# Altium PCB PCB1.PcbDoc
Units mm, origin at the board's own origin, x right, y up, seen from the top; angles counter-clockwise.
Board outline 38.29 x 38.22 mm, 4 copper layers (Top Layer, 3V3, GND, Bottom Layer), stack 0.603 mm thick; 55 components, 36 nets, 203 pads, 85 vias.
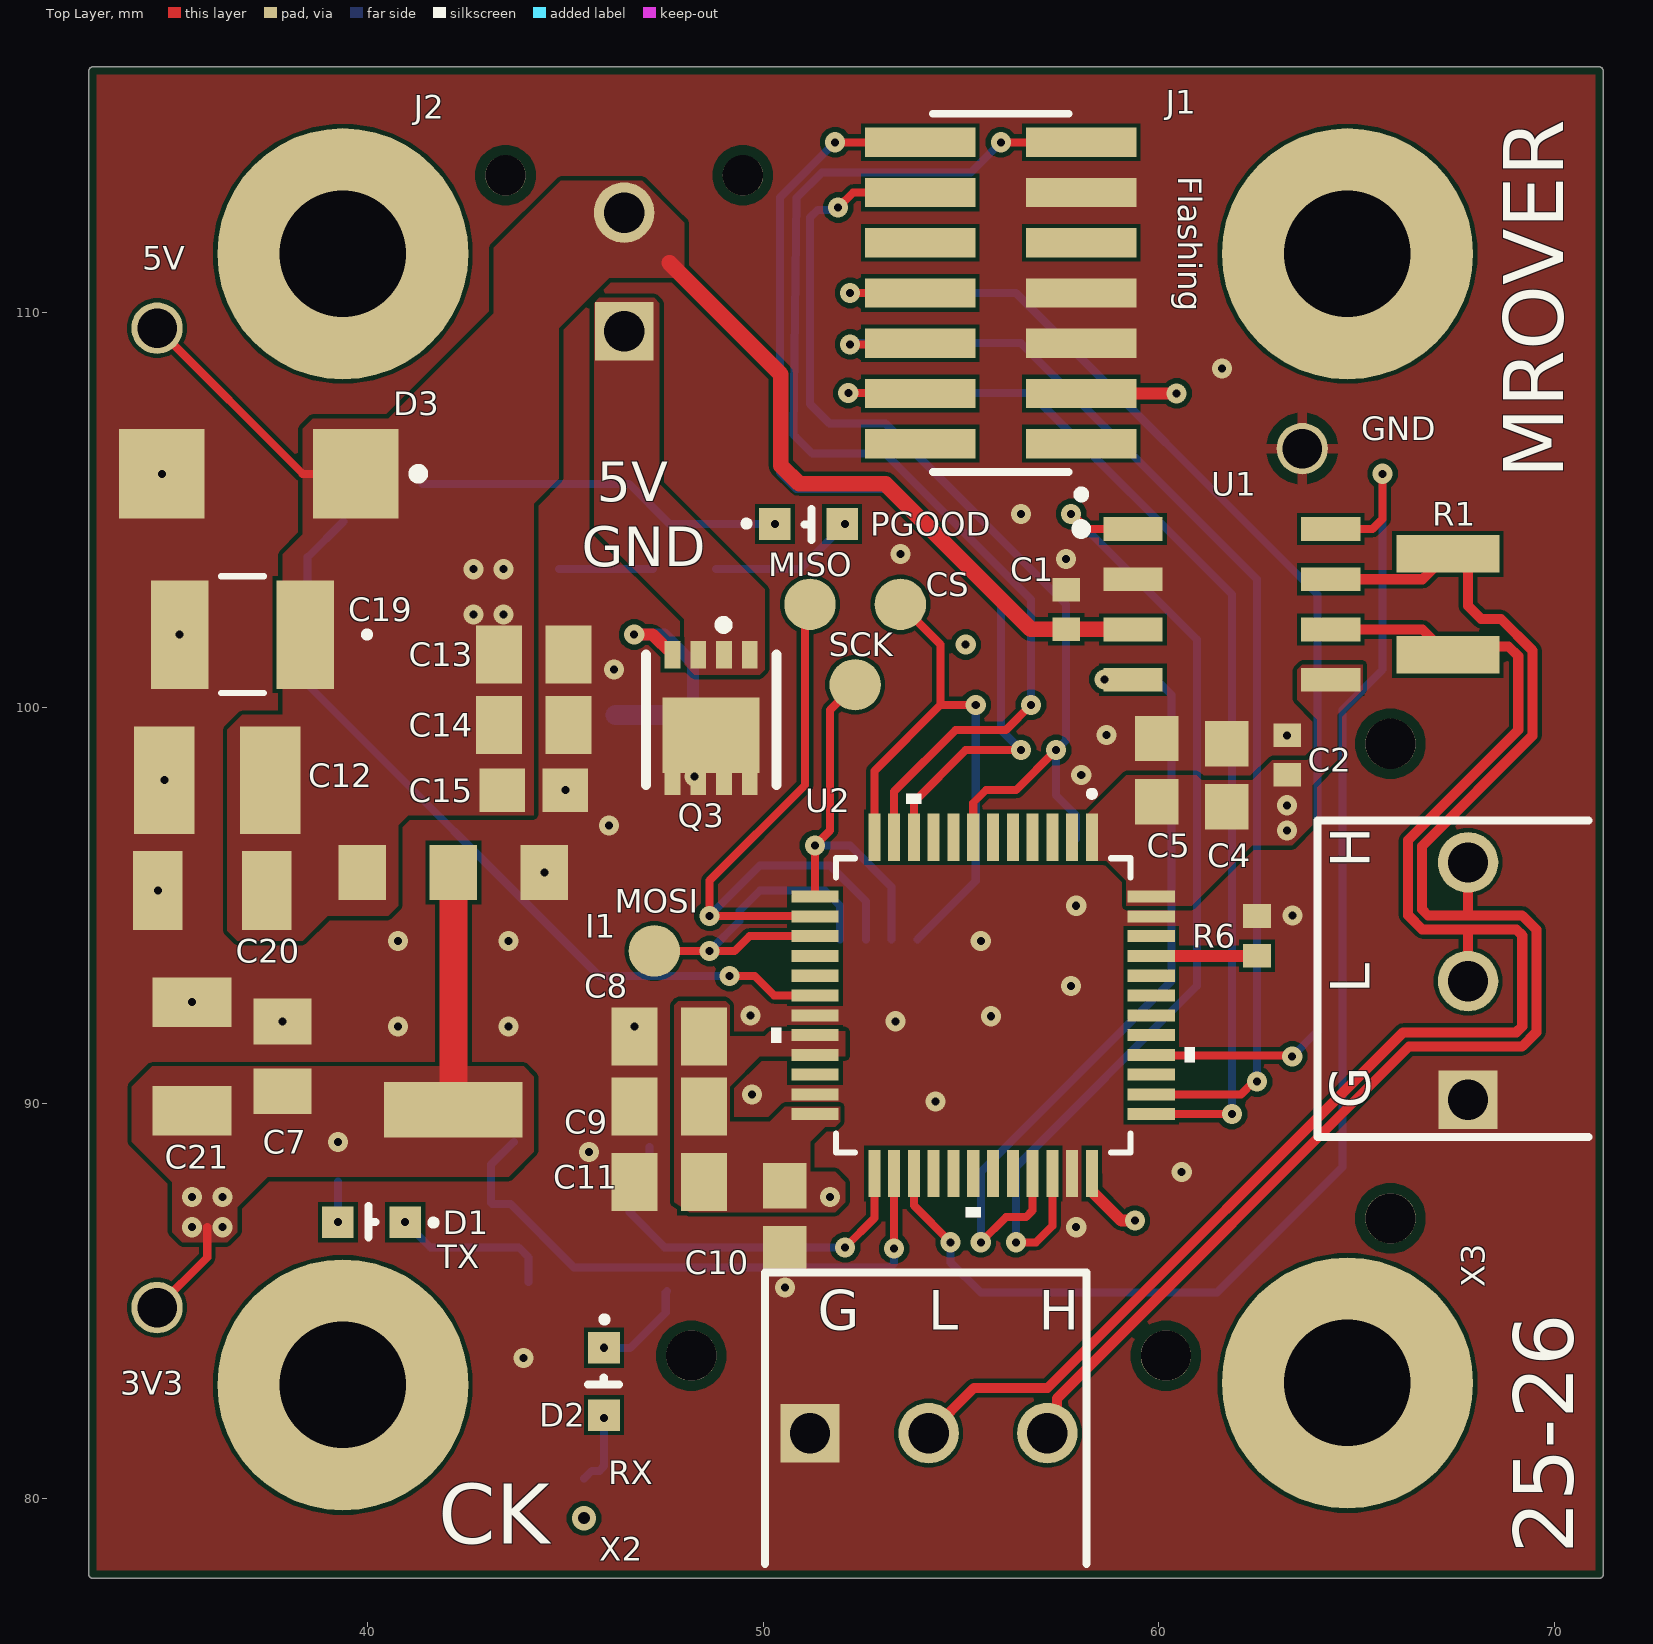
[diagram p0: Top Layer view]
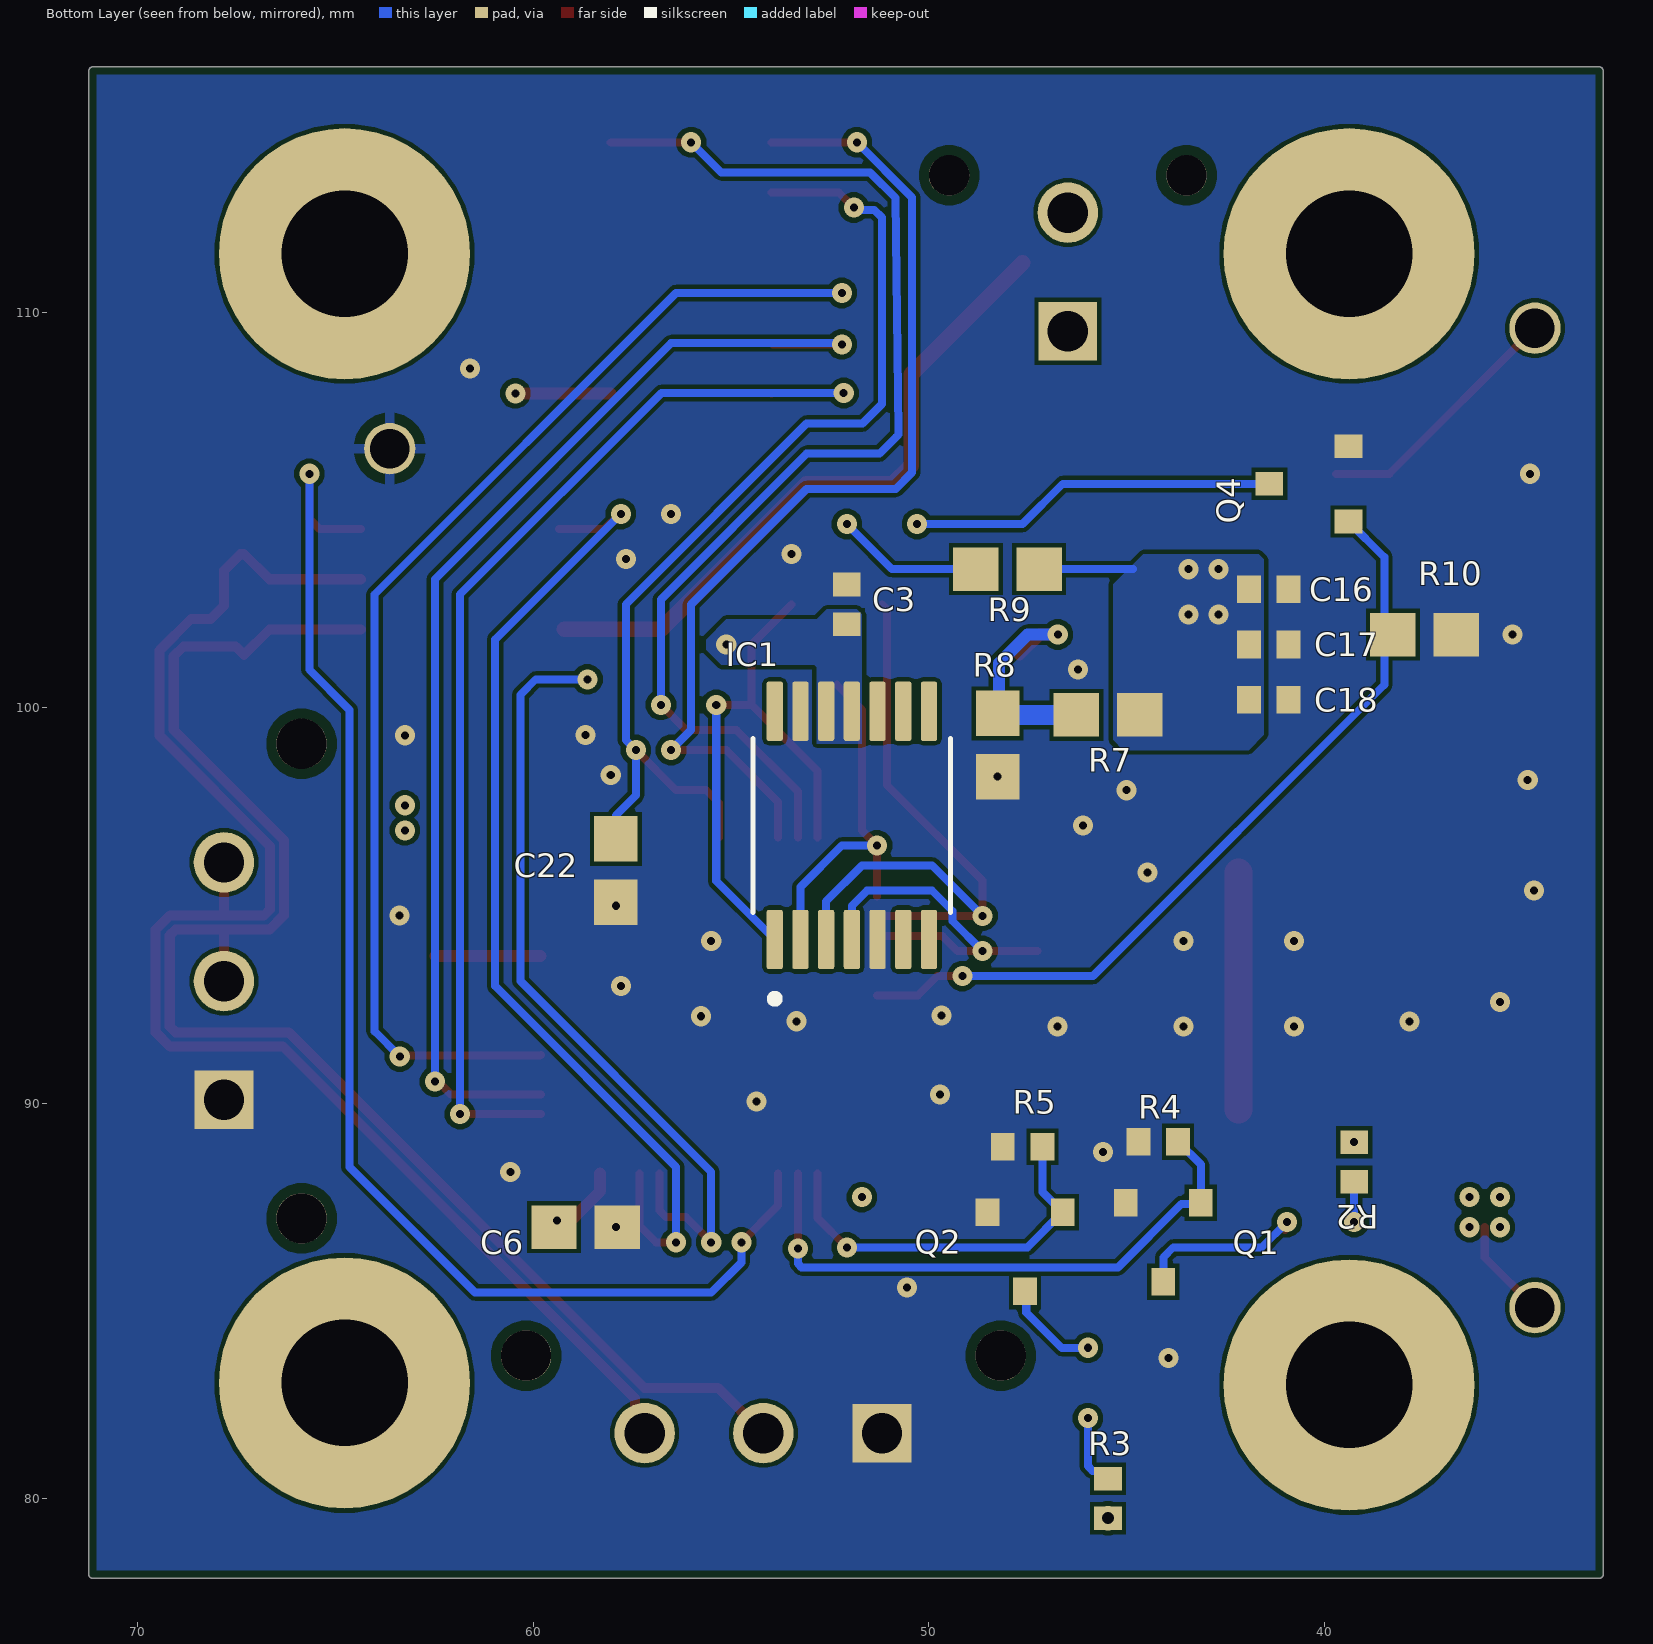
[diagram p1: Bottom Layer view, seen from below]
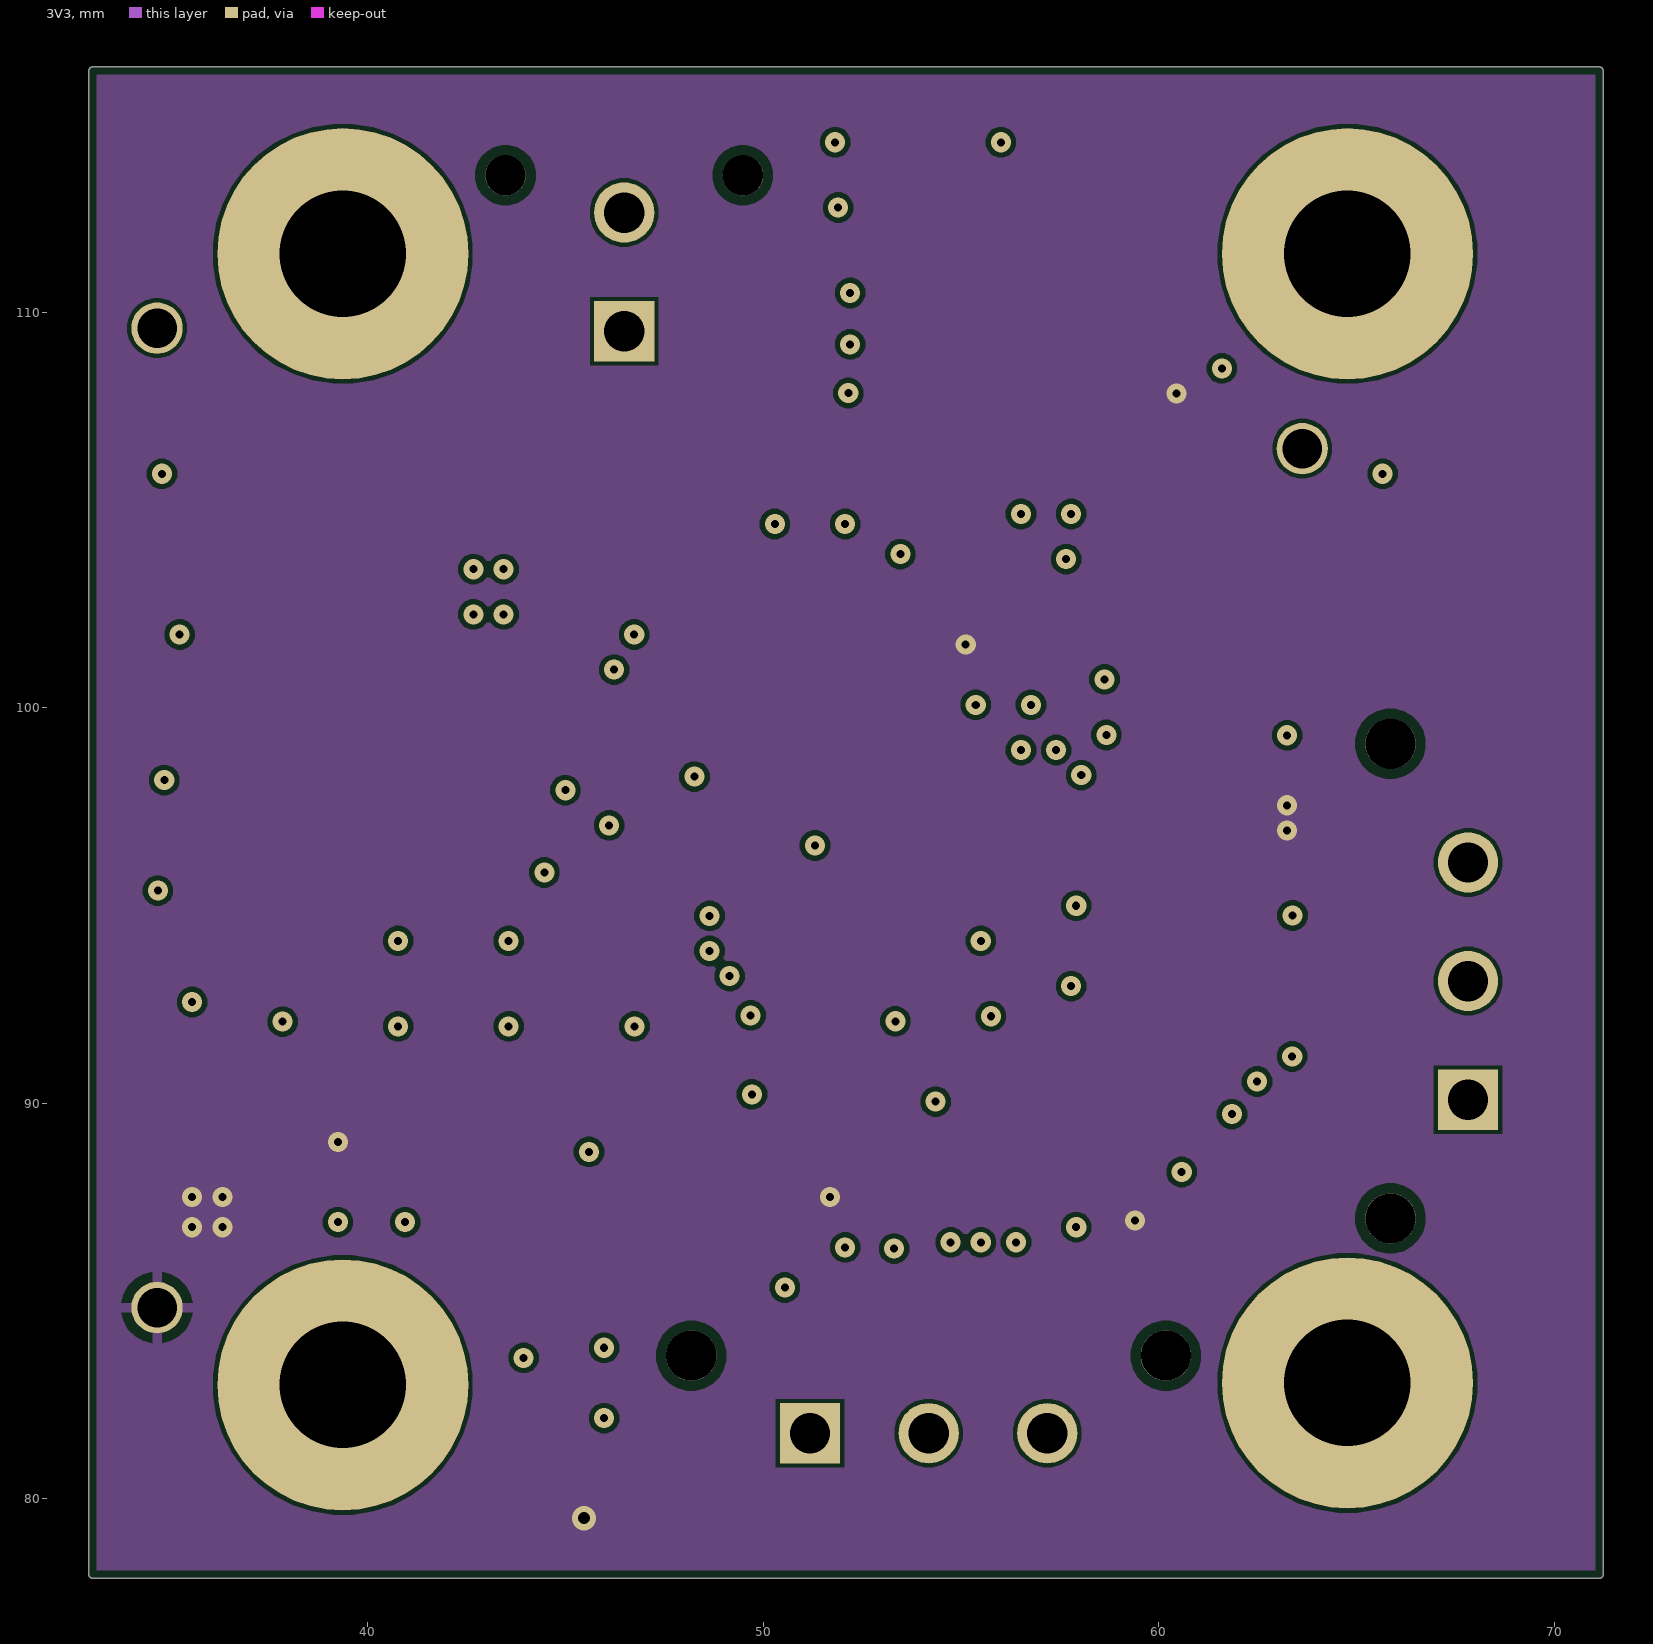
[diagram p2: 3V3]
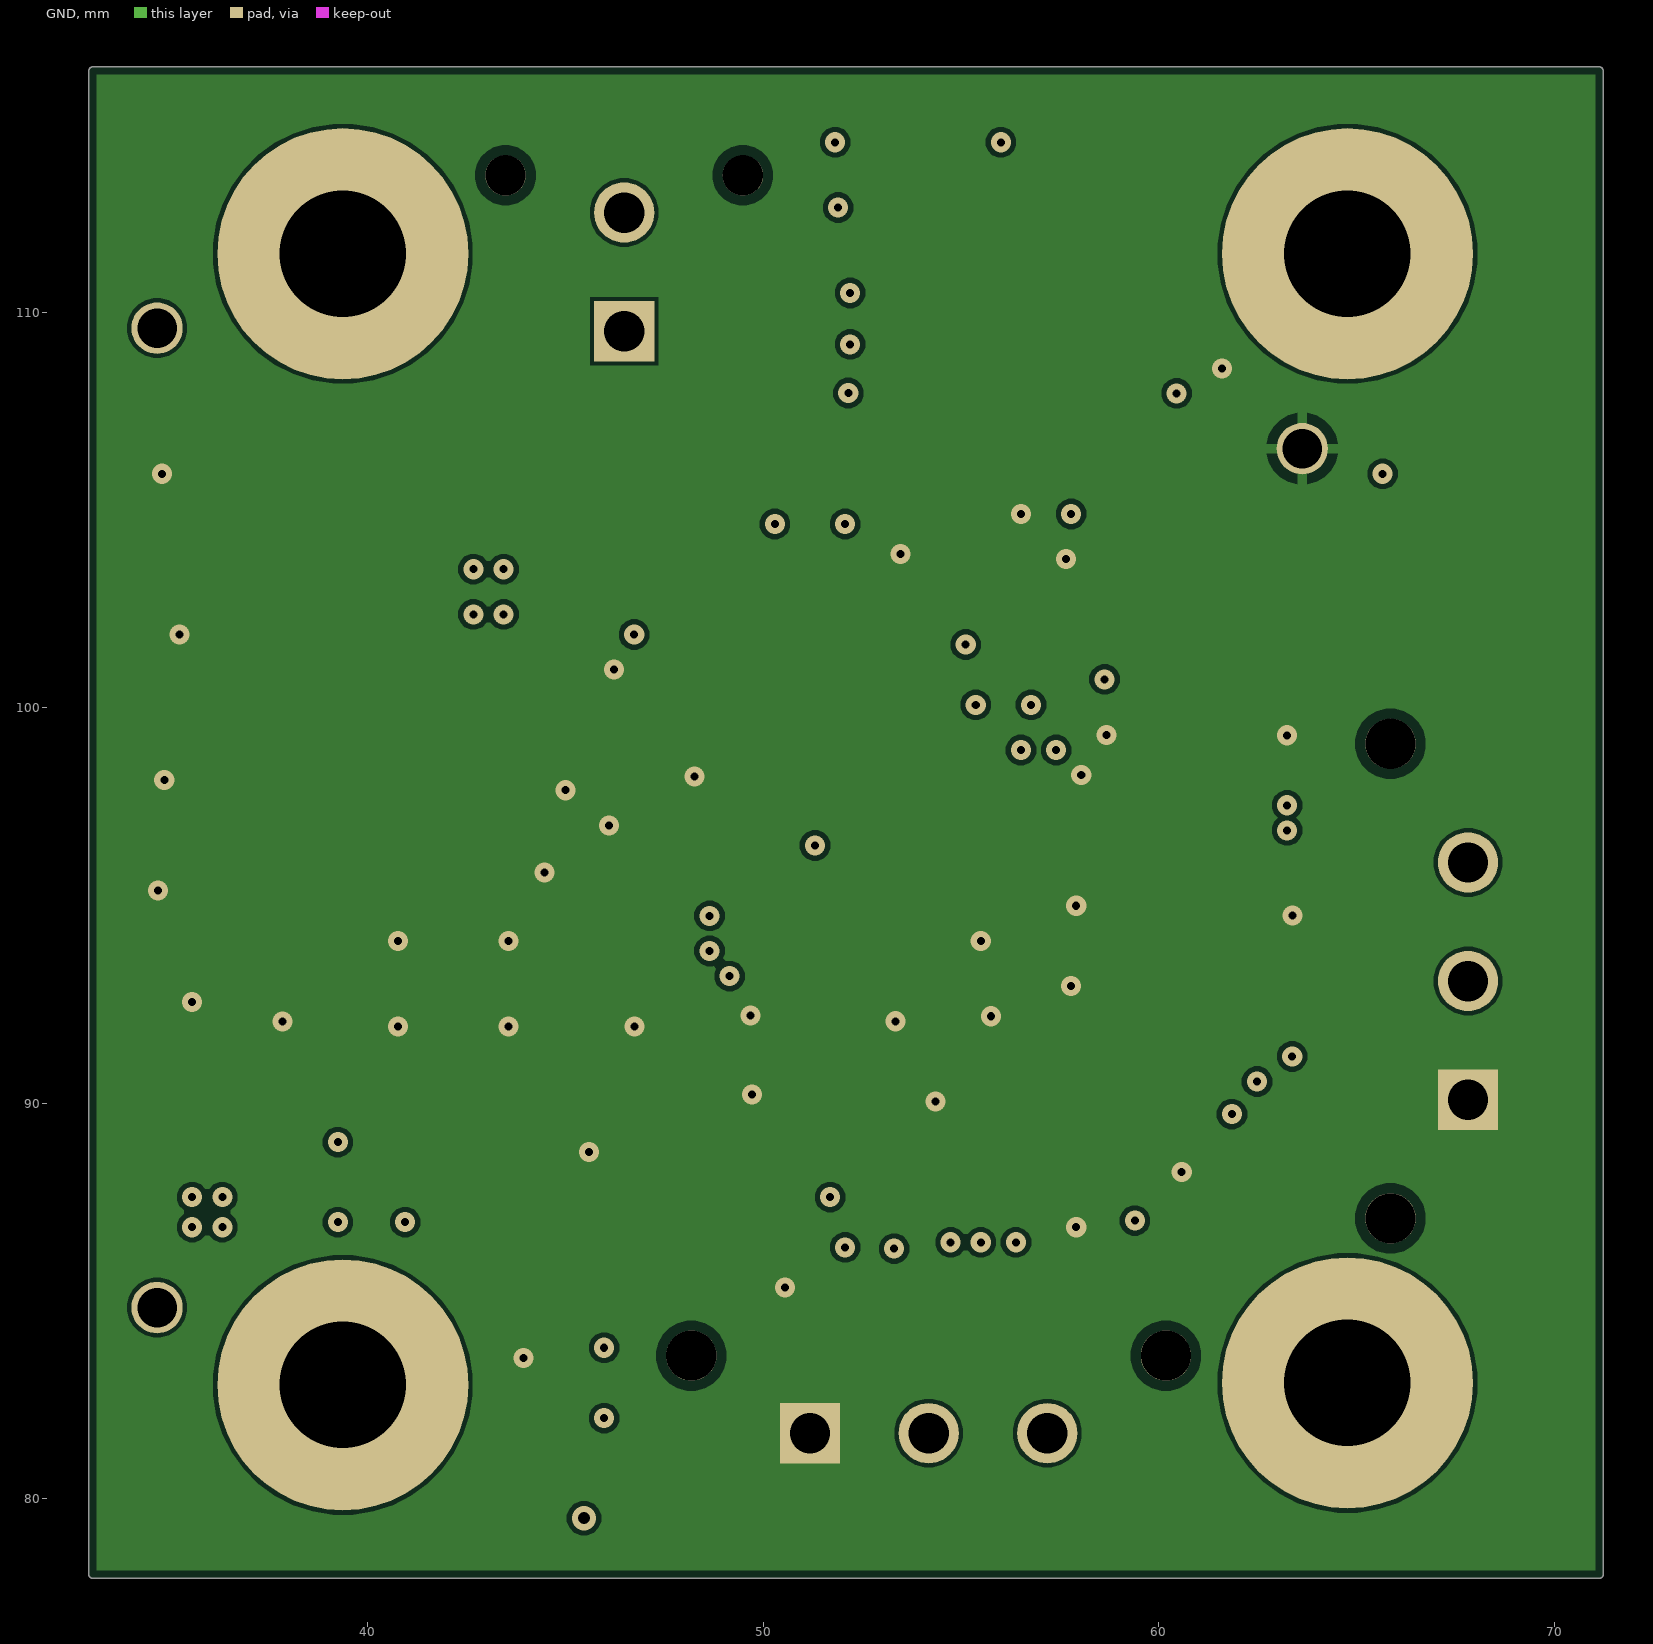
[diagram p3: GND]

## Layer stack, top to bottom
Top Solder: solder mask 0.0102, Solder Resist, Dk 3.5
Top Layer: signal copper 0.0356
Dielectric 2: prepreg 0.0711, PP-006, Dk 4.1
3V3: signal copper 0.035
Dielectric 1: dielectric 0.32, FR-4, Dk 4.8
GND: signal copper 0.035
Dielectric 3: prepreg 0.0711, PP-006, Dk 4.1
Bottom Layer: signal copper 0.0356
Bottom Solder: solder mask 0.0102, Solder Resist, Dk 3.5

## Board outline
33.048,77.989 cw(c33.048,78.091) 32.948,78.112 32.946,78.133 32.946,116.106 cw(c33.048,116.106) 33.048,116.208 71.134,116.208 cw(c71.134,116.106) 71.236,116.106 71.236,78.091 cw(c71.134,78.091) 71.134,77.989

## Design rules (kind name [scope] priority, off if disabled: settings)
BoardOutlineClearance [All] p1: gap=0.2 ignorepadtopadclearanceinfootprint=FALSE
Clearance "Stitching GND" [IsStitchingVia and InNet('GND') vs (IsVia and (Not IsStitchingVia)) Or IsPad] p1: gap=0.127 ignorepadtopadclearanceinfootprint=FALSE
Clearance [All] p2: gap=0.102 ignorepadtopadclearanceinfootprint=FALSE except(0.127: Arc-Via Track-Via SMDPad-Via THPad-Via Via-Via Via-Fill Via-Poly Via-Region Via-Text; 0.25: Arc-Hole Track-Hole SMDPad-Hole THPad-Hole Via-Hole Fill-Hole Poly-Hole Region-Hole Text-Hole)
ComponentClearance [All] p1: gap=0.102 collisioncheckmode=3 verticalgap=0.102 showdistances=TRUE
DiffPairsRouting [All] p1: maxlimit=0.102 minlimit=0.102 mostfreqgap=0.102 toplayer_minwidth=0.102 toplayer_maxwidth=1816.048 toplayer_prefwidth=0.102 midlayer1_minwidth=0.102 midlayer1_maxwidth=1816.048 midlayer1_prefwidth=0.102 midlayer2_minwidth=0.102 midlayer2_maxwidth=1816.048 midlayer2_prefwidth=0.102 bottomlayer_minwidth=0.102 bottomlayer_maxwidth=1816.048 bottomlayer_prefwidth=0.102 maxuncoupledlength=12.7
DiffPairsRouting USB [OnLayer('Top Layer') And InDifferentialPairClass('USB')] p2: maxlimit=0.127 minlimit=0.127 mostfreqgap=0.127 toplayer_maxgap=0.127 toplayer_prefgap=0.127 toplayer_minwidth=0.237 toplayer_maxwidth=0.237 toplayer_prefwidth=0.237 midlayer1_mingap=0.127 midlayer1_minwidth=0.089 midlayer1_maxwidth=0.089 midlayer1_prefwidth=0.089 midlayer2_mingap=0.127 midlayer2_minwidth=0.089 midlayer2_maxwidth=0.089 midlayer2_prefwidth=0.089 bottomlayer_maxgap=0.127 bottomlayer_prefgap=0.127 bottomlayer_minwidth=0.237 bottomlayer_maxwidth=0.237 bottomlayer_prefwidth=0.237 impedanceprofiledriven=TRUE impedanceprofileid={C8994B27-2D6B-4B4B-A1C4-DCAF0529D0FB} maxuncoupledlength=12.7
Height [All] p1: minheight=0 maxheight=1816.048 prefheight=12.7
HoleSize [All] p1: absolutevalues=TRUE maxlimit=6.3 minlimit=0.2 maxpercent=80.000 minpercent=20.000
HoleToHoleClearance [All] p1: gap=0.25 allowstackedmicrovias=FALSE
MinimumAnnularRing [All] p1: minimumring=0.076
MinimumSolderMaskSliver [All] p1: minsoldermaskwidth=0
PlaneClearance [All] p1: clearance=0.102
PlaneConnect PlaneConnectPowerPads [InPadClass('PowerPads')] p1: planeconnectstyle=Direct reliefexpansion=0.508 reliefentries=4 reliefconductorwidth=0.254 reliefairgap=0.254
PlaneConnect [All] p2: planeconnectstyle=Direct reliefexpansion=0.3 reliefentries=4 reliefconductorwidth=0.102 reliefairgap=0.102
PolygonConnect PolygonConnectPowerPads [All vs (InPadClass('PowerPads'))] p1: connectstyle=Direct reliefconductorwidth=0.254 reliefentries=4 polygonreliefangle="90 Angle" airgapwidth=0.254
PolygonConnect [All] p2: connectstyle=Direct reliefconductorwidth=0.102 reliefentries=4 polygonreliefangle="90 Angle" airgapwidth=0.102
RoutingVias [All] p1: holewidth=0.305 width=0.605 viastyle="Through Hole" minholewidth=0.3 minwidth=0.6 maxholewidth=0.405 maxwidth=0.705
SilkToSilkClearance [All] p1: silktosilkclearance=0
SilkToSolderMaskClearance [IsPad] p1: minsilkscreentomaskgap=0.102 clearancetoexposedcopper=TRUE
SolderMaskExpansion [All] p1: expansion=0.075 istentingtop=FALSE
SupplyNets "Schematic Supply Nets_2" [InNet('VBAT')] p1: voltage=0.000
SupplyNets "Schematic Supply Nets_3" [InNet('GND')] p2: voltage=0.000
SupplyNets "Schematic Supply Nets_1" [InNet('5V')] p3: voltage=0.000
Width [All] p1: maxlimit=0.508 minlimit=0.102 preferedwidth=0.254 minimp=50.000000 maximp=50.000000 favimp=50.000000
20 further rules are at their usual default settings.

## Classes and differential pairs
component class MCU: C4 C5 C6 C7 C8 C9 C10 C11 C22 D4 J1 Q4 R6 R9 U2
component class Input_Power: C12 C13 C14 C15 C16 C17 C18 C19 C20 C21 D3 I1 Q3 R7 R8 TP1 TP2
component class Headers: X2 X3
component class Encoder: C3 IC1 TP3 TP4 TP5 TP6
component class CAN: C1 C2 D1 D2 Q1 Q2 R1 R2 R3 R4 R5 U1
differential pair CAN: +CAN_H -CAN_L

## Components (designator, comment, footprint, x,y, rotation, side; value= is the part's Value field where it differs from the comment)
3V3 "5003" TEST-POINT-0001 34.671,84.836 r0 top (schematic designator TP1)
5V "5003" TEST-POINT-0001 34.671,109.601 r0 top (schematic designator TP2)
C1 "CC0402KRX7R7BB104" CAP-0402 57.658,102.489 r90 top
C2 "CC0402KRX7R7BB104" CAP-0402 63.246,98.806 r90 top
C3 "CC0402KRX7R7BB104" CAP-0402 52.07,102.616 r90 bottom
C4 "CC0603KRX7R0BB104" CAP-0603 61.722,98.298 r270 top
C5 "CC0603KRX7R0BB104" CAP-0603 59.944,98.425 r270 top
C6 "CC0603KRX7R0BB104" CAP-0603 58.674,86.868 r0 bottom
C7 "CC0805KKX5R9BB475" CAP-0805 37.846,91.186 r270 top
C8 "GRM2195C1H103JA01D" CAP-0805 47.625,91.694 r0 top
C9 "CC0805KKX7R9BB105" CAP-0805 47.625,89.916 r0 top
C10 "CC0603KRX7R0BB104" CAP-0603 50.546,87.122 r90 top
C11 "CC0805KKX7R9BB105" CAP-0805 47.625,88.011 r0 top
C12 "CL32B106KBJNNNE" CAP-1210 36.195,98.171 r0 top
C13 "CC0805KKX7R9BB105" CAP-0805 44.196,101.346 r180 top
C14 "CC0805KRX7R9BB104" CAP-0805 44.196,99.568 r180 top
C15 "CC0603KPX7R9BB103" CAP-0603 44.196,97.917 r180 top
C16 "CC0402KRX7R9BB102" CAP-0402 41.402,102.997 r0 bottom
C17 "CC0402JRNPO9BN101" CAP-0402 41.402,101.6 r0 bottom
C18 "CC0402JRNPO9BN100" CAP-0402 41.402,100.203 r0 bottom
C19 "EMK325ABJ107MM-T" CAP_EMK325AB_3P2X2P5_TAY-M 36.83,101.854 r180 top
C20 "293D106X9016A2TE3" CAP-1206 36.068,95.377 r0 top
C21 "293D106X9016A2TE3" CAP-1206 35.56,91.186 r270 top
C22 "CC0603KRX7R0BB104" CAP-0603 57.912,95.885 r270 bottom
CS "5003" TEST02 53.467,102.616 r90 top (schematic designator TP3)
D1 "BL-HKC36G-AV-TRB" LED-0603 41.534,87.746 r180 top
D2 "BL-HKC36G-AV-TRB" LED-0603 45.223,84.409 r270 top
D3 "SMBJ6.0" "DO-214AA (SMBJ)" 37.211,105.918 r0 top
GND "5003" TEST-POINT-0001 63.627,106.553 r0 top (schematic designator TP?)
I1 "LM1117IMPX-3.3/NOPB" IC-SOT-223-4 42.164,92.837 r270 top
IC1 "AS5047D-ATSM" SOP65P640X110-14N 51.943,97.028 r90 bottom
J1 "FTSH-107-01-L-DV-K" SAMTEC_FTSH-107-01-L-DV-K 56.004,110.49 r90 top
J2 "0430450212" CONN-2POS-0001 46.482,109.522 r0 top (schematic designator J?)
MISO "5003" TEST02 51.181,102.616 r90 top (schematic designator TP5)
MOSI "5003" TEST02 47.244,93.853 r90 top (schematic designator TP6)
PGOOD "BL-HKC36G-AV-TRB" LED-0603 49.703,103.897 r0 top (schematic designator D4)
Q1 "T2N7002AK,LM" IC-SOT23-3 44.069,86.487 r0 bottom
Q2 "T2N7002AK,LM" IC-SOT23-3 47.564,86.249 r0 bottom
Q3 "CSD18543Q3AT" IC-8VSONCLIP 50.519,102.223 r180 top
Q4 "T2N7002AK,LM" IC-SOT23-3 40.386,105.664 r90 bottom
R1 "RC1210FR-07120RL" RES-1210 67.31,102.616 r90 top
R2 "RC0402FR-07100RL" RES-0402 39.243,88.519 r90 bottom
R3 "RC0402FR-07100RL" RES-0402 45.466,80.01 r270 bottom
R4 "RC0402FR-0780K6L" RES-0402 44.196,89.027 r180 bottom
R5 "RC0402FR-0780K6L" RES-0402 47.625,88.9 r180 bottom
R6 "RC0402FR-070RL" RES-0402 62.484,94.234 r270 top
R7 "RC0603FR-07200KL" RES-0603 45.466,99.822 r0 bottom
R8 "RC0603FR-07100KL" RES-0603 48.26,99.06 r270 bottom
R9 "RT0603FRE131KL" RES-0603 48.006,103.505 r0 bottom
R10 "RT0603FRE131KL" RES-0603 37.465,101.854 r0 bottom (schematic designator R?)
SCK "5003" TEST02 52.324,100.584 r90 top (schematic designator TP4)
U1 "TCAN1044VDRQ1" IC-8SOIC 61.849,102.616 r270 top
U2 "STM32G431CBT6" IC-LQFP48 55.558,92.476 r270 top
X2 "Molex 43650-0315" 43650-0315 54.181,81.661 r180 top
X3 "Molex 43650-0315" 43650-0315 67.818,93.091 r270 top

## Footprints (in the part's own frame and the unit in brackets; to place one, negate y for a bottom-side part, rotate by r counter-clockwise, add the part's x,y. Pads: shape width x height; smd on the part's side, far side on the other; paste and mask are expansions set on the pad)
43650-0315 [mm]
  round 1.27 hole 1.27 unplated: 1(-6,-1.96) 1(6,-1.96)
  rect 1.482x1.482 / inner rect 1.524x1.524 / far side rect 1.482x1.482 hole 1.02: P$1(3,0)
  round 1.53 / inner round 1.524 / far side round 1.53 hole 1.02: P$2(0,0) P$3(-3,0)
  body extent -6.32,-2.47 6.33,3.14, height 10.03
CAP-0402 [mm]
  rect 0.6x0.7 smd: 1(-0.5,0) 2(0.5,0)
  body extent -0.5,-0.22 0.5,0.23, height 0.5
CAP-0603 [mm]
  rect 1.15x1.1 smd: 1(-0.8,0) 2(0.8,0)
  body extent -0.8,-0.45 0.8,0.45, height 0.8
CAP-0805 [mm]
  rect 1.16x1.47 smd: 1(-0.88,0) 2(0.88,0)
  body extent -1,-0.63 1,0.63, height 0.94
CAP-1206 [mm]
  rect 1.25x2 smd: 1(-1.375,0) 2(1.375,0)
  body extent -1.6,-0.8 1.6,0.8, height 1.5
CAP-1210 [mm]
  rect 1.53x2.72 smd: 1(-1.341,0) 2(1.341,0)
  body extent -1.6,-1.25 1.6,1.25, height 2.7
CAP_EMK325AB_3P2X2P5_TAY-M [mil]
  rect 57x108 smd paste+0 mask+0: 1(-62.5,0) 2(62.5,0)
  silkscreen extent -127,-58 22,58
CONN-2POS-0001 [mm]
  round 1.02 hole 1.02 unplated: 1(-3,3.94) 1(3,3.94)
  rect 1.482x1.482 / inner rect 1.524x1.524 / far side rect 1.482x1.482 hole 1.02: 1(0,0)
  round 1.53 / inner round 1.524 / far side round 1.53 hole 1.02: 2(0,3)
  body extent -3.57,-2.42 3.57,6.35, height 9.91
"DO-214AA (SMBJ)" [mm]
  rect 2.16x2.26 smd: 1(-2.416,0) 2(2.484,0)
  silkscreen extent 3.94,-0.12 4.19,0.12, body extent -2.72,-1.95 2.78,1.95, height 2.45
IC-8SOIC [mm]
  rect 0.6x1.5 smd: 1(-1.905,-2.5) 2(-0.635,-2.5) 3(0.635,-2.5) 4(1.905,-2.5) 5(1.905,2.5) 6(0.635,2.5) 7(-0.635,2.5) 8(-1.905,2.5)
  silkscreen extent -2.03,-3.93 -1.78,-3.68, body extent -2.45,-3 2.45,3, height 1.75
IC-8VSONCLIP [mm]
  rect 0.4x0.7 smd paste-100 mask+0.05: 1(2.812,0.877) 2(0.862,0.877) 2(1.512,0.877) 2(2.162,0.877) 3(0.862,4.077) 3(1.512,4.077) 3(2.162,4.077) 3(2.812,4.077)
  rect 2.45x1.9 smd paste-100 mask+0.05: 3(1.837,2.917)
  silkscreen extent 0.19,0.03 3.49,4.18, body extent 0.18,0.89 3.48,4.19, height 1.1
IC-LQFP48 [mm]
  rect 1.194x0.305 smd paste+0 mask+0: 1(-4.25,2.75) 2(-4.25,2.25) 3(-4.25,1.75) 4(-4.25,1.25) 5(-4.25,0.75) 6(-4.25,0.25) 7(-4.25,-0.25) 8(-4.25,-0.75) 9(-4.25,-1.25) 10(-4.25,-1.75) 11(-4.25,-2.25) 12(-4.25,-2.75) 25(4.25,-2.75) 26(4.25,-2.25) 27(4.25,-1.75) 28(4.25,-1.25) 29(4.25,-0.75) 30(4.25,-0.25) 31(4.25,0.25) 32(4.25,0.75) 33(4.25,1.25) 34(4.25,1.75) 35(4.25,2.25) 36(4.25,2.75)
  rect 0.305x1.194 smd paste+0 mask+0: 13(-2.75,-4.25) 14(-2.25,-4.25) 15(-1.75,-4.25) 16(-1.25,-4.25) 17(-0.75,-4.25) 18(-0.25,-4.25) 19(0.25,-4.25) 20(0.75,-4.25) 21(1.25,-4.25) 22(1.75,-4.25) 23(2.25,-4.25) 24(2.75,-4.25) 37(2.75,4.25) 38(2.25,4.25) 39(1.75,4.25) 40(1.25,4.25) 41(0.75,4.25) 42(0.25,4.25) 43(-0.25,4.25) 44(-0.75,4.25) 45(-1.25,4.25) 46(-1.75,4.25) 47(-2.25,4.25) 48(-2.75,4.25)
  silkscreen extent -5.43,-5.35 5.35,5.35, body extent -4.5,-4.5 4.5,4.5, height 1.6
IC-SOT23-3 [mm]
  rect 0.6x0.7 smd: 1(-0.95,-1) 2(0.95,-1) 3(0,1)
  body extent -1.46,-1.18 1.46,1.18, height 1.12
IC-SOT-223-4 [mm]
  rect 1.4x1.2 smd mask+0.07: 1(-3,2.3) 3(-3,-2.3) 4(-3,0)
  rect 1.4x3.5 smd: 2(3,0)
  body extent -3.5,-3.25 3.5,3.25, height 1.68
LED-0603 [mm]
  rect 0.8x0.8 smd: 1(2.291,0.751) 2(0.589,0.751)
  silkscreen extent -0.2,0.34 1.52,1.13, body extent 0.65,0.36 2.25,1.16, height 0.39
RES-0402 [mm]
  rect 0.6x0.7 smd: 1(-0.5,0) 2(0.5,0)
  body extent -0.5,-0.25 0.5,0.25, height 0.3
RES-0603 [mm]
  rect 1.15x1.1 smd: 1(-0.8,0) 2(0.8,0)
  body extent -0.8,-0.4 0.8,0.4, height 0.43
RES-1210 [mm] "Chip Resistor, 2-Leads, Body 3.10x2.60mm, IPC High Density"
  rect 0.95x2.6 smd: 1(-1.275,0) 2(1.275,0)
  body extent -1.6,-1.35 1.6,1.35, height 0.6
SAMTEC_FTSH-107-01-L-DV-K [mm]
  rect 0.74x2.79 smd: 01(-3.81,-2.035) 02(-3.81,2.035) 03(-2.54,-2.035) 04(-2.54,2.035) 05(-1.27,-2.035) 06(-1.27,2.035) 07(0,-2.035) 08(0,2.035) 09(1.27,-2.035) 10(1.27,2.035) 11(2.54,-2.035) 12(2.54,2.035) 13(3.81,-2.035) 14(3.81,2.035)
  silkscreen extent -5.19,-2.13 4.53,1.72, body extent -4.44,-2.82 4.44,3.02, height 5.96
SOP65P640X110-14N [mm]
  rrect25% 1.5x0.41 smd paste+0: 1(-2.885,1.95) 2(-2.885,1.3) 3(-2.885,0.65) 4(-2.885,0) 5(-2.885,-0.65) 6(-2.885,-1.3) 7(-2.885,-1.95) 8(2.885,-1.95) 9(2.885,-1.3) 10(2.885,-0.65) 11(2.885,0) 12(2.885,0.65) 13(2.885,1.3) 14(2.885,1.95)
  silkscreen extent -4.48,-2.5 2.2,2.5
TEST02 [mm]
  round 1.3 smd: 1(0,0)
TEST-POINT-0001 [mm] "2024 miniature test point"
  round 1.3 hole 1: 1(0,0)
  body extent -1.27,-1.27 1.27,1.27, height 4.57

## Part data
3V3 5V GND: library part TEST-POINT-0001, "Oranange PC Test Point, Miniature Phoisphor Bronze Silver Plating Through Hole Mounting Type"
C1 C2 C3: library part CAP-0.1U-0001, "CAP CER 0.1UF 16V X7R 0402", Capacitance="100 nF", Voltage Rating="16 V", ComponentLink2Description=Datasheet, ComponentLink2URL=https://www.yageo.com/upload/media/product/productsearch/datasheet/mlcc/UPY-GPHC_X7R_6.3V-to-250V_24.pdf, Device Class=Ceramic, Size=0402
C4 C5 C6 C10 C22: library part CAP-100N-0001, "CAP CER 0.1UF 100V X7R 0603", Capacitance="100 nF", Voltage="100 V", ComponentLink1Description=Datasheet, ComponentLink1URL=https://www.yageo.com/upload/media/product/app/datasheet/mlcc/upy-np0x7r_mv_100-to-630v.pdf, Device Class=Ceramic, Size=0603
C7: library part CAP-4.7U-0002, "CAP CER 4.7UF 50V X5R 0805", Capacitance="4.7 uF", Voltage="50 V", ComponentLink2Description=Datasheet, ComponentLink2URL=http://www.yageo.com/documents/recent/UPY-GPHC_Y5V_6.3V-to-50V_8.pdf, Device Class=Ceramic, Size=0805
C8: library part CAP-10N-0001, "CAP CER 10000PF 50V C0G/NP0 0805", Capacitance=10nF, Voltage=50V, ComponentLink1Description=Datasheet, ComponentLink1URL=https://search.murata.co.jp/Ceramy/image/img/A01X/G101/ENG/GRM2195C1H103JA01-01.pdf, Device Class=Ceramic, Size=0805
C9 C11 C13: library part CAP-1U-0001, "CAP CER 1UF 50V X7R 0805", Capacitance="1.0 uF", Voltage="50 V", ComponentLink2Description=Datasheet, ComponentLink2URL=https://www.yageo.com/upload/media/product/productsearch/datasheet/mlcc/UPY-GPHC_X7R_6.3V-to-250V_24.pdf, Device Class=Ceramic, Size=0805
C12: library part CAP-10U-0002, "CAP CER 10UF 50V X7R 1210", Capacitance="10 uF", Voltage=50V, ComponentLink1Description=Datasheet, ComponentLink1URL=https://mm.digikey.com/Volume0/opasdata/d220001/medias/docus/41/CL32B106KBJNNNE_Spec.pdf, Device Class=Ceramic, Size=1210
C14: library part CAP-0.1U-0002, "CAP CER 0.1UF 50V X7R 0805", Capacitance="100 nF", Voltage Rating="50 V", ComponentLink2Description=Datasheet, ComponentLink2URL=https://www.yageo.com/upload/media/product/productsearch/datasheet/mlcc/UPY-GPHC_X7R_6.3V-to-250V_24.pdf, Device Class=Ceramic, Size=0805
C15: library part CAP-10N-0002, "CAP CER 10000PF 50V X7R 0603", Capacitance="10 nF", Voltage="50 V", ComponentLink2Description=Datasheet, ComponentLink2URL=http://www.yageo.com/documents/recent/UPY-GPHC_X7R_6.3V-to-50V_18.pdf, Device Class=Ceramic, Size=0603
C16: library part CAP-1N-0001, "CAP CER 1000PF 50V X7R 0402", Capacitance="1.0 nF", Voltage="50 V", ComponentLink2Description=Datasheet, ComponentLink2URL=http://www.yageo.com/documents/recent/UPY-GP_NP0_16V-to-50V_16.pdf, Device Class=Ceramic, Size=0402
C17: library part CAP-100P-0001, "CAP CER 100PF 50V C0G/NPO 0402", Capacitance="100 pF", Voltage=50V, ComponentLink1Description=Datasheet, ComponentLink1URL=https://www.yageo.com/upload/media/product/productsearch/datasheet/mlcc/UPY-GP_NP0_16V-to-50V_18.pdf, Device Class=Ceramic, Size=0402
C18: library part CAP-10P-0001, "CAP CER 10PF 50V C0G/NPO 0402", Capacitance="10 pF", Voltage=50V, ComponentLink1Description=Datasheet, ComponentLink1URL=https://www.yageo.com/upload/media/product/productsearch/datasheet/mlcc/UPY-GP_NP0_16V-to-50V_18.pdf, Device Class=Ceramic, Size=0402
C19: library part CAP-100uf-16v, "CAP CER 100UF 16V X5R 1210", Mfr_Name="Taiyo Yuden", Parameter 1="100 uf", Parameter 2=16V
C20 C21: library part CAP-10U-0004, "CAP TANT 10UF 10% 16V 1206", Capacitance="10 uF", Voltage=16V, ComponentLink1Description=Datasheet, ComponentLink1URL=https://www.lcsc.com/datasheet/lcsc_datasheet_2304140030_Vishay-Intertech-293D106X9016A2TE3_C110038.pdf, Device Class=Tantalum, Size=1206
CS MISO MOSI SCK: library part TEST-POINT-0002, "Surface Mount"
D1 D2 PGOOD: library part LED-0001, "LED YELLOW CLEAR 0603 SMD", Forward Current=30mA, Forward Voltage=2V, ComponentLink1Description=Datasheet, ComponentLink1URL=https://www.americanbrightled.com/pdffiles/led-components/smt/BL-HKC36G-AV-TRB.pdf
D3: library part DIO-TVS-0001, "TVS DIODE 40VWM 64.5VC DO214AA", Current Rating=9.3A, Voltage Rating=64.5V, ComponentLink1Description=Datasheet, ComponentLink1URL=https://www.littelfuse.com/media?resourcetype=datasheets&itemid=09a6ae9a-73cb-4ac4-acac-e6dab92ab953&filename=littelfuse_tvs_diode_smbj_datasheet.pdf
I1: library part IC_LDO_3V3_0001, "IC REG LIN 3.3V 800MA SOT223-4", ComponentLink1Description="New link", ComponentLink1URL=https://www.ti.com/lit/ds/symlink/lm1117.pdf?HQS=dis-dk-null-digikeymode-dsf-pf-null-wwe&ts=1721700739746
IC1: library part IC-ABSENC-0001, "Hall Effect Sensor Rotary Position External Magnet, Not Included Gull Wing", Package="TSSOP-14 ams", Check_prices=https://www.snapeda.com/parts/AS5047D-ATSM/ams/view-part/?ref=eda, ComponentLink1Description=Datasheet, ComponentLink1URL=https://www.mouser.com/datasheet/3/5912/1/AS5047U_DS000637_1_01.pdf, MF=ams, MP=AS5047D-ATSM, SnapEDA_Link=https://www.snapeda.com/parts/AS5047D-ATSM/ams/view-part/?ref=snap
J1: library part CONN_Flashing-0001, "Connector Header Surface Mount 14 position 0.050\" (1.27mm)", Package=None, Availability=Unavailable, ComponentLink1Description=Datasheet, ComponentLink1URL=https://mm.digikey.com/Volume0/opasdata/d220001/medias/docus/6209/ftsh-1xx-xx-xxx-dv-xxx-xxx-x-xx-mkt.pdf, MF=Samtec, MP=FTSH-107-01-L-DV-K, Price=None
J2: library part CONN-2POS-0001, "CONN HEADER VERT 2POS", ComponentLink1Description=Datasheet, ComponentLink1URL=https://tools.molex.com/pdm_docs/ps/PS-43045.pdf
Q1 Q2 Q4: library part NMOS-200MA-0001, "MOSFET N-CH 60V 200MA SOT23", Continuous Current=200mA, Voltage=60V, ComponentLink1Description=Datasheet, ComponentLink1URL=https://toshiba.semicon-storage.com/info/T2N7002AK_datasheet_en_20150401.pdf?did=29712&prodName=T2N7002AK
Q3: library part NMOS-60A-0001, "MOSFET N-CH 60V 12A/60A 8VSON", Continuous Current=60A, Voltage=60V, ComponentLink2Description=Datasheet, ComponentLink2URL=http://www.ti.com/lit/ds/symlink/csd18543q3a.pdf
R1: library part RES-120-0001, "RES 120 OHM 1% 1/2W 1210", Power=1/2W, Resistance=120R, Tolerance=1%, ComponentLink1Description=Datasheet, ComponentLink1URL=https://www.yageo.com/upload/media/product/products/datasheet/rchip/PYu-RC_Group_51_RoHS_L_12.pdf, Size=1210
R2 R3: library part RES-100-0001, "RES 100 OHM 1% 1/16W 0402", Power=1/16W, Resistance=100R, Tolerance=1%, ComponentLink1Description=Datasheet, ComponentLink1URL=https://www.yageo.com/upload/media/product/products/datasheet/rchip/PYu-RC_Group_51_RoHS_L_12.pdf, Size=0402
R4 R5: library part RES-80.6k-0001, "80.6 kOhms ±1% 0.063W, 1/16W Chip Resistor 0402 (1005 Metric) Moisture Resistant Thick Film", Power=1/16W, Resistance=80.6k, Tolerance=1%, ComponentLink1Description=Datasheet, ComponentLink1URL=https://www.yageo.com/upload/media/product/products/datasheet/rchip/PYu-RC_Group_51_RoHS_L_12.pdf, Size=0402
R6: library part RES-0-0002-JLC, "62.5mW Thick Film Resistors 50V -55℃~+155℃ 0Ω 0402 Chip Resistor - Surface Mount ROHS", JLC part number=C106231, Power="62.5 mW", Resistance="0 Ohm", Assembled?=yes
R7: library part RES-200k-0001, "RES SMD 200K OHM 1% 1/10W 0603", Power=100mW, Resistance=200k, Tolerance=1%, ComponentLink1Description=Datasheet, ComponentLink1URL=https://www.yageo.com/upload/media/product/products/datasheet/rchip/PYu-RC_Group_51_RoHS_L_12.pdf, Size=0603
R8: library part RES-100k-0001, "RES SMD 100K OHM 1% 1/10W 0603", Power=100mW, Resistance=100k, Tolerance=1%, ComponentLink1Description=Datasheet, ComponentLink1URL=https://www.yageo.com/upload/media/product/products/datasheet/rchip/PYu-RC_Group_51_RoHS_L_12.pdf, Size=0603
R9 R10: library part RES-1K-0002, "1 kOhms ±1% 0.1W, 1/10W Chip Resistor 0603 (1608 Metric) Thin Film", Manufacturer=YAGEO, Package Size=0603, Power Rating=1/10W, Resistance="1kOhm +/-1%", Assembled?=no, Manufacturer Part Number=RT0603FRE131KL
U1: library part IC-CAN-0001, "IC TRANSCEIVER 1/1 8SOIC", ComponentLink1Description=Datasheet, ComponentLink1URL=https://www.ti.com/lit/ds/symlink/tcan1044-q1.pdf?HQS=dis-dk-null-digikeymode-dsf-pf-null-wwe&ts=1728758303289&ref_url=https%253A%252F%252Fwww.ti.com%252Fgeneral%252Fdocs%252Fsuppproductinfo.tsp%253FdistId%253D10%2526gotoUrl%253Dhttps%253A%252F%252Fwww.ti.com%252Flit%252Fgpn%252Ftcan1044-q1
U2: library part IC-STM32G431CBT6, "IC MCU 32BIT 128KB FLASH 48LQFP", Package=48LQFP, ComponentLink1Description=Datasheet, ComponentLink1URL=https://www.st.com/resource/en/datasheet/stm32g431cb.pdf
X2 X3: library part "Micro-Fit Molex 3 Pin Vertical", Package=43650-0315, DeviceName=43650-0315, DeviceSetName=HEADER_POS3_?, GateName_1=G$1, LibraryName=con-molex-micro-fit-3_0_2, SymbolName_1=HEADER_POS3

## Free pads (board coordinates)
  round 6.35 hole 3.2: ""(39.37,82.88) ""(39.37,111.481) ""(64.77,82.931) ""(64.77,111.481)

## Via types
v1: diameter 0.508, hole 0.203, Top Layer to Bottom Layer, 84 vias
v2: diameter 0.608, hole 0.303, Top Layer to Bottom Layer, 1 vias

## Nets (pads, with @x,y where several pads share a name; then routed paths per layer and width w, separated by ;. In a path a pad name is that pad's centre, name@x,y a point inside that pad or via, vN(x,y) a via of type N, cw(c..) or ccw(c..) an arc to the next point about the centre after c; other vN are vias at no path point)
5V: 5V.1 C1.1 C12.2 C13.2 C14.2 C15.2 C16.2 C17.2 C18.2 C19.1 C20.2 D3.2 I1.3 J2.2 R7.1 R9.1 U1.3 | length 25.7
  Top Layer w0.203: 5V.1 38.354,105.918 D3.2
  Top Layer w0.4: 47.625,111.252 50.442,108.435 50.442,106.129 50.907,105.664 53.086,105.664 56.761,101.989 C1.1 U1.3@59.214,101.989
  Bottom Layer w0.203: 44.831,103.505 R9.1
  other v1: 42.672,102.362 43.434,102.362 42.672,103.505 43.434,103.505
A: IC1.7
B: IC1.6
CAN_H: R1.2 U1.7 X2.P$3 X3.P$3 | length 38.6
  Top Layer w0.254: X2.P$3 57.421,81.901 57.421,82.534 66.327,91.44 69.188,91.44 69.545,91.797 69.545,94.395 69.188,94.752 67.818,94.752 ; U1.7 66.67,103.251 R1.2 67.394,103.891 67.818,103.467 67.818,102.578 68.152,102.244 68.655,102.244 69.444,101.456 69.444,99.294 66.66,96.51 66.66,94.901 66.809,94.752 67.818,94.752 ; X3.P$3 67.818,94.752
CAN_L: R1.1 U1.6 X2.P$2 X3.P$2 | length 38.8
  Top Layer w0.254: X2.P$2 55.324,82.804 57.188,82.804 66.18,91.796 69.041,91.796 69.19,91.944 69.19,94.248 69.041,94.397 66.661,94.397 66.304,94.754 66.304,96.657 69.088,99.441 69.088,101.308 68.842,101.554 67.523,101.554 R1.1 66.67,101.981 U1.6 ; X3.P$2 67.818,94.337
CAN_RX: U1.4 U2.33 | length 20.3
  Top Layer w0.203: v1(55.499,86.487) 56.134,87.122 56.642,87.122 56.808,87.288 U2.33
  Bottom Layer w0.203: v1(55.499,86.487) 55.499,88.265 60.325,93.091 60.325,100.33 59.933,100.722 v1(58.628,100.722)
CAN_RX_LED: Q2.1 R5.2 U2.25 | length 9.9
  Top Layer w0.203: v1(52.07,86.36) 52.808,87.098 U2.25
  Bottom Layer w0.203: R5.2 47.125,87.76 Q2.1 47.503,86.36 v1(52.07,86.36)
CAN_STB: U1.8 U2.27 | length 34.7
  Top Layer w0.203: U2.27 53.808,87.416 v1(54.737,86.487) ; U1.8 65.405,104.521 65.659,104.775 v1(65.659,105.918)
  Bottom Layer w0.203: v1(54.737,86.487) 54.737,85.979 55.499,85.217 61.468,85.217 64.643,88.392 64.643,99.949 65.659,100.965 v1(65.659,105.918)
CAN_TX: U1.1 U2.34 | length 25.8
  Top Layer w0.203: v1(56.388,86.487) 56.896,86.487 57.308,86.899 U2.34 ; v1(57.785,104.902) 57.813,104.902 58.194,104.521 U1.1
  Bottom Layer w0.203: v1(56.388,86.487) 56.388,88.392 60.96,92.964 60.96,101.727 v1(57.785,104.902)
CAN_TX_LED: Q1.1 R4.2 U2.26 | length 15
  Top Layer w0.203: v1(53.308,86.328) U2.26
  Bottom Layer w0.203: R4.2 43.119,88.45 Q1.1 43.147,87.459 43.605,87.459 45.212,85.852 53.213,85.852 53.308,85.947 v1(53.308,86.328)
GND: C1.2 C2.2 C3.2 C4.1 C5.1 C6.1 C7.1 C8.1 C9.1 C10.1 C11.1 C12.1 C13.1 C14.1 C15.1 C16.1 C17.1 C18.1 C19.2 C20.1 C21.1 C22.2 D3.1 GND.1 I1.1 IC1.5 IC1.13 J1.05 J1.07 J1.11 Q1.2 Q2.2 Q3.3 Q4.2 R4.1 R5.1 R6.1 R8.2 R10.1 U1.2 U2.19 U2.23 U2.35 U2.47 X2.P$1 X3.P$1 | length 0.1
  Top Layer w0.203: X3.P$1@67.77,90.043 X3.P$1
  other v1: 43.942,83.566 50.546,85.344 57.912,86.868 60.579,88.265 45.593,88.773 54.356,90.043 49.713,90.226 40.767,91.948 43.561,91.948 46.745,91.948 37.846,92.066 53.34,92.075 55.753,92.202 49.681,92.226 35.56,92.561 57.785,92.964 40.767,94.107 43.561,94.107 55.499,94.107 63.381,94.75 57.912,94.996 34.693,95.377 44.464,95.837 46.101,97.028 44.996,97.917 34.854,98.171 48.26,98.26 58.039,98.298 58.674,99.314 63.246,99.306 46.228,100.965 35.242,101.854 57.658,103.759 53.467,103.886 56.515,104.902 34.795,105.918 61.595,108.585
I: IC1.14
NetD1_1: D1.1 R2.1 | length 1.1
  Top Layer w0.203: v1(39.243,86.995) D1.1@39.294,86.995
  Bottom Layer w0.203: v1(39.243,86.995) R2.1
NetD1_2: D1.2 Q1.3 | length 4.3
  Top Layer w0.203: v1(40.945,86.995) 40.996,86.944 D1.2@40.996,86.792
  Bottom Layer w0.203: v1(40.945,86.995) 41.58,86.36 43.815,86.36 44.069,86.106 Q1.3
NetD2_1: D2.1 R3.1 | length 1.9
  Bottom Layer w0.203: R3.1 45.664,80.708 45.855,80.708 45.974,80.827 v1(45.974,82.042)
NetD2_2: D2.2 Q2.3 | length 2.5
  Bottom Layer w0.203: v1(45.974,83.82) 45.98,83.814 46.634,83.814 47.534,84.713 47.534,85.219 Q2.3
NetD4_1: PGOOD.1 R9.2 | length 3.7
  Bottom Layer w0.203: R9.2 50.927,103.505 v1(52.07,104.648)
NetD4_2: PGOOD.2 Q4.3 | length 9.3
  Bottom Layer w0.203: Q4.3 46.609,105.664 47.625,104.648 v1(50.292,104.648)
NetQ3_1: Q3.1 R7.2 R8.1 | length 6.2
  Top Layer w0.303: v1(46.736,101.854) 47.199,101.854 Q3.1
  Bottom Layer w0.303: v1(46.736,101.854) 47.498,101.854 48.222,101.13 R8.1@48.222,99.822
  Bottom Layer w0.503: R7.2 R8.1@48.222,99.822
NetR6_2: R6.2 U2.45 | length 2.7
  Top Layer w0.3: U2.45 R6.2@62.476,93.726
NRST: C22.1 J1.12 U2.7 | length 26.1
  Top Layer w0.203: v1(51.892,112.649) 52.273,113.03 J1.12 ; U2.7 55.308,97.599 55.626,97.917 56.388,97.917 v1(57.404,98.933)
  Bottom Layer w0.203: v1(51.892,112.649) 51.833,112.591 51.377,112.591 51.181,112.395 51.181,107.68 51.673,107.188 53.086,107.188 57.658,102.616 57.658,99.187 v1(57.404,98.933) 57.404,97.79 57.912,97.282 C22.1
PGOOD: Q4.1 R10.2 U2.18 | length 20.6
  Top Layer w0.203: v1(49.149,93.218) 49.784,93.218 50.276,92.726 U2.18
  Bottom Layer w0.203: Q4.1 38.481,103.809 38.481,102.616 38.481,100.584 45.847,93.218 v1(49.149,93.218)
RevPolDrain: J2.1@46.482,109.522 Q3.2
SPI_CS: CS.1 IC1.1 U2.12 | length 14.4
  Top Layer w0.203: U2.12 52.808,98.401 54.483,100.076 ; CS.1 54.483,101.6 54.483,100.076 ; v1(55.372,100.076) 54.483,100.076
  Bottom Layer w0.203: IC1.1 55.372,95.622 v1(55.372,100.076)
SPI_MISO: IC1.3 MISO.1 U2.14 | length 17.4
  Top Layer w0.203: MISO.1 51.054,102.489 51.054,98.044 48.641,95.631 v1(48.641,94.742) U2.14@51.292,94.742
  Bottom Layer w0.203: v1(48.641,94.742) 49.911,96.012 51.689,96.012 52.593,95.108 IC1.3
SPI_MOSI: IC1.4 MOSI.1 U2.15 | length 9.3
  Top Layer w0.203: MOSI.1 v1(48.641,93.853) 49.276,93.853 49.649,94.226 U2.15
  Bottom Layer w0.203: v1(48.641,93.853) 49.403,94.615 49.403,94.869 49.911,95.377 51.562,95.377 51.943,94.996 IC1.4
SPI_SCK: IC1.2 SCK.1 U2.13 | length 9.5
  Top Layer w0.203: U2.13 v1(51.308,96.52) 51.689,96.901 51.689,98.044 51.689,99.949 SCK.1
  Bottom Layer w0.203: v1(51.308,96.52) 52.197,96.52 53.243,95.474 IC1.2
SWCLK: J1.06 U2.38 | length 30.1
  Top Layer w0.203: v1(52.197,109.191) 53.94,109.191 J1.06 ; U2.38 62.077,90.226 62.402,90.551 v1(62.484,90.551)
  Bottom Layer w0.203: v1(52.197,109.191) 52.226,109.22 56.515,109.22 62.484,103.251 v1(62.484,90.551)
SWDIO: J1.04 U2.37 | length 28.8
  Top Layer w0.203: v1(52.149,107.96) 53.959,107.96 J1.04 ; U2.37 v1(61.849,89.726)
  Bottom Layer w0.203: v1(52.149,107.96) 56.759,107.96 61.849,102.87 61.849,98.933 61.849,96.901 61.849,91.567 v1(61.849,89.726)
SWO: J1.08 U2.40 | length 32.3
  Top Layer w0.203: v1(52.197,110.49) J1.08 ; U2.40 59.828,91.206 63.353,91.206 v1(63.373,91.186)
  Bottom Layer w0.203: v1(52.197,110.49) 56.388,110.49 64.008,102.87 64.008,91.821 v1(63.373,91.186)
U: IC1.10
UART_RX: J1.13 U2.11 | length 29.7
  Top Layer w0.203: U2.11 53.308,97.885 54.864,99.441 56.134,99.441 v1(56.769,100.076) ; v1(56.007,114.3) J1.13
  Bottom Layer w0.203: v1(56.007,114.3) 55.245,113.538 51.485,113.538 50.834,112.887 50.762,106.995 50.762,106.908 50.821,106.849 51.244,106.426 53.086,106.426 56.769,102.743 v1(56.769,100.076)
UART_TX: J1.14 U2.10 | length 26.1
  Top Layer w0.203: v1(51.816,114.3) J1.14 ; U2.10 53.808,97.623 55.118,98.933 v1(56.515,98.933)
  Bottom Layer w0.203: v1(51.816,114.3) 50.419,112.903 50.419,105.951 50.833,105.537 53.086,105.537 56.007,102.616 56.007,99.441 v1(56.515,98.933)
V: IC1.9
VBAT: 3V3.1 C2.1 C3.1 C4.2 C5.2 C6.2 C7.2 C8.2 C9.2 C10.2 C11.2 C21.2 I1.2 I1.4 IC1.11 IC1.12 J1.03 R2.2 R3.2 U1.5 U2.1 U2.20 U2.21 U2.24 U2.36 U2.48 | length 12.8
  Top Layer w0.203: 3V3.1 35.941,86.106 35.941,86.868
  Top Layer w0.3: U2.36 58.308,87.782 59.055,87.035 v1(59.396,87.035)
  Top Layer w0.303: J1.03 v1(60.452,107.95)
  Top Layer w0.703: I1.2 I1.4
  other v1: 35.56,86.868 36.322,86.868 35.56,87.63 36.322,87.63 51.689,87.63 39.243,89.019 63.246,96.901 63.246,97.536 55.118,101.6
  other v2: 45.466,79.51
W: IC1.8
pads on no net: J1.01 J1.02 J1.09 J1.10 J2.1@43.482,113.462 J2.1@49.482,113.462 U2.2 U2.3 U2.4 U2.5 U2.6 U2.8 U2.9 U2.16 U2.17 U2.22 U2.28 U2.29 U2.30 U2.31 U2.32 U2.39 U2.41 U2.42 U2.43 U2.44 U2.46 X2.1 X3.1

## Polygon pours and split planes (outlines as drawn)
5V on Top Layer "5V_L01_P000" (solid, remove dead copper, pour order 0): 47.752,110.871 48.006,111.125 48.006,112.268 47.752,112.522 46.944,113.33 44.877,113.33 43.18,111.633 43.18,109.982 40.513,107.315 38.608,107.315 38.354,107.061 38.354,104.394 37.846,103.886 37.846,99.822 36.83,99.822 36.449,99.441 36.449,94.361 36.703,94.107 38.354,94.107 38.989,94.742 40.513,94.742 40.767,94.996 40.767,97.028 41.021,97.282 44.196,97.282 44.196,105.154 44.831,105.789 44.831,109.601 46.101,110.871
GND on Top Layer "GND_L01_P017" (solid, pour order 17): 32.766,117.602 33.02,117.348 74.295,117.348 74.295,77.216 71.882,74.803 69.469,77.216 32.131,77.216
VBAT on Top Layer "VBAT_L01_P008" (solid, pour order 8): 47.85,92.583 47.752,92.485 47.752,87.503 48.133,87.249 51.816,87.249 52.07,87.503 52.07,88.011 51.816,88.265 51.181,88.265 51.181,89.027 51.562,89.408 51.816,89.408 51.943,89.535 51.943,89.916 50.546,89.916 50.165,89.535 49.149,89.535 49.149,90.424 49.911,91.186 52.07,91.186 52.07,91.821 50.165,91.821 50.038,91.694 49.149,91.694 49.149,92.484 49.05,92.583
RevPolDrain on Top Layer "REVPOLDRAIN_L01_P003" (solid, pour order 3): 45.72,110.236 45.847,110.363 47.244,110.363 47.371,110.236 47.371,105.664 50.038,102.997 50.038,100.965 49.911,100.838 48.26,100.838 48.006,101.092 48.006,102.235 45.72,104.521
VBAT on Top Layer "VBAT_L01_P006" (solid, pour order 6): 62.357,96.52 63.373,96.52 63.881,97.028 63.881,98.044 64.516,98.679 64.516,99.822 65.151,100.457 65.151,101.092 63.627,101.092 63.5,100.965 63.5,100.203 64.008,99.695 64.008,98.933 63.754,98.679 62.865,98.679 62.357,98.171 61.087,98.171 60.96,98.298 59.182,98.298 58.166,97.282 58.166,96.266 58.293,96.139 58.674,96.139 59.182,95.631 59.182,94.996 60.833,94.996
VBAT on Top Layer "VBAT_L01_P001" (solid, pour order 1): 36.449,86.487 36.703,86.741 36.703,87.376 37.465,88.138 43.561,88.138 44.196,88.773 44.196,90.678 43.942,90.932 34.544,90.932 34.036,90.424 34.036,89.027 35.052,88.011 35.052,86.741 35.306,86.487
GND on Bottom Layer "GND_L04_P018" (solid, pour order 18): 32.512,117.348 73.406,117.348 73.66,117.602 73.66,74.295 30.988,74.295 30.607,74.676
5V on Bottom Layer "5V_L04_P011" (solid, pour order 11): 44.577,103.886 45.339,103.124 45.339,99.187 45.085,98.933 41.91,98.933 41.529,99.314 41.529,103.759 41.656,103.886
VBAT on Bottom Layer "VBAT_L04_P010" (solid, pour order 10): 52.832,101.028 52.895,101.092 55.245,101.092 55.626,101.473 55.626,101.727 55.118,102.235 52.832,102.235 52.578,102.489 51.816,102.489 51.689,102.362 51.689,99.097 52.832,99.097
GND on GND "GND_L03_P014" (solid, pour order 14): 31.75,116.967 32.004,116.713 72.39,116.713 72.39,75.565 72.136,75.819 30.988,75.819
VBAT on 3V3 "VBAT_L02_P015" (solid, pour order 15): 31.623,117.094 73.152,117.094 73.152,74.549 31.369,74.549 30.607,75.311

## Silkscreen, mask and mechanical layers (free items; w line width, h text height)
Top Overlay:
  lines w0.203: 50.038,78.359 50.038,85.725 58.166,85.725 58.166,78.359 ; 70.866,89.154 64.008,89.154 64.008,97.155 70.866,97.155
  text "Flashing" at 60.498,113.438 h0.6 r270
  text "MROVER" at 70.231,105.791 h1.52 r90
  text "5V" at 45.793,105.229 h1
  text "GND" at 45.412,103.578 h1
  text "H" at 65.332,95.958 h1 r90
  text "L" at 65.332,92.783 h1 r90
  text "G" at 65.332,89.862 h1 r90
  text "TX" at 41.756,85.825 h0.6
  text "G" at 51.381,84.274 h1
  text "L" at 54.175,84.274 h1
  text "H" at 56.969,84.274 h1
  text "RX" at 46.074,80.364 h0.6
  text "CK" at 41.783,78.867 h1.52
  text "25-26" at 70.485,78.613 h1.52 r90